# EAGLE board chirp-v2.4 (EAGLE 6.4)
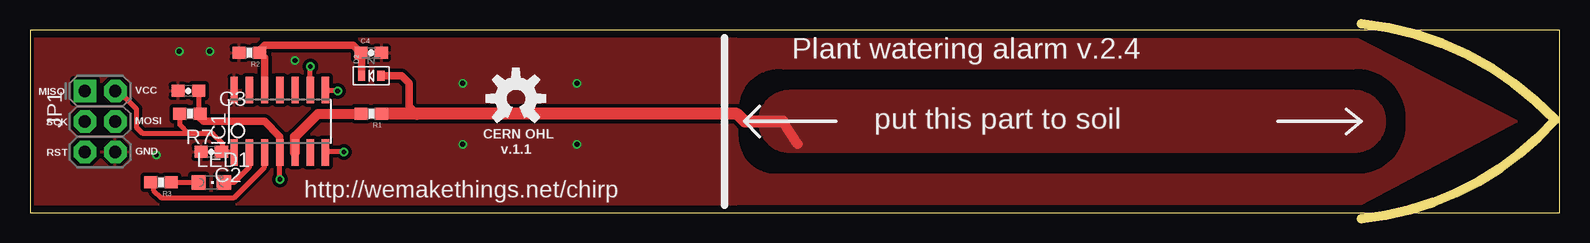
[diagram p0: board, top side]
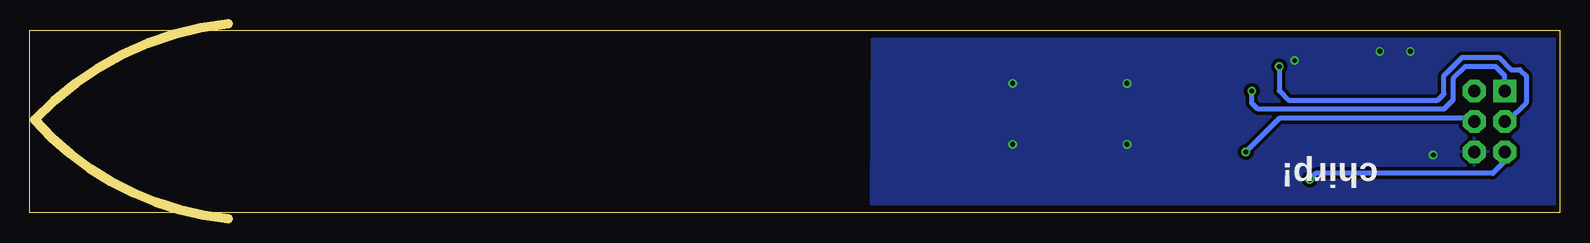
[diagram p1: board, bottom side, seen from below]

Size 127.51 x 15.24 mm. Coordinates in mm from the lower left corner, seen from the top.
Outline: 0,0 127.51,0 127.51,15.24 0,15.24 0,0
Copper layers (1*16): Top 0.035mm / dielectric 1.5mm / Bottom 0.035mm
Design rules "Fusion_eagle_rule_v1.1": minimum track width 6mil, minimum drill 12mil, track to track 6mil, track to pad 6mil, pad to pad 6mil, via to via 6mil, smd to smd 0mil, copper to edge 10mil, drill to drill 10mil, minimum pad ring 10mil, minimum via ring 6mil, stop-mask expansion 2mil, vias tented up to drill 100mil, thermal gap 10mil
Milling: 2 lines

## Footprints (pad centres in the part's own frame; a part is rotated, then mirrored left to right if it is on the bottom)
0603-CAP = smd 1.1 x 1: 1 -0.85,0; 2 0.85,0
SOD-523 = smd 0.8 x 0.6: A 0,-0.8; K 0,0.8
SOIC14 = smd 0.61 x 2.21: 1 -3.81,-2.603; 2 -2.54,-2.603; 3 -1.27,-2.603; 4 0,-2.603; 5 1.27,-2.603; 6 2.54,-2.603; 7 3.81,-2.603; 8 3.81,2.603; 9 2.54,2.603; 10 1.27,2.603; 11 0,2.603; 12 -1.27,2.603; 13 -2.54,2.603; 14 -3.81,2.603
2X3-NS = drill 1.016 pad 1.88 square: 1 -2.54,-1.27 | drill 1.016 pad 1.88 octagon: 2 -2.54,1.27; 3 0,-1.27; 4 0,1.27; 5 2.54,-1.27; 6 2.54,1.27
CHIPLED_0805 = smd 1.2 x 1.2: A 0,-1.05; C 0,1.05
0603-RES = smd 1.1 x 1: 1 -0.85,0; 2 0.85,0

## Placement (x,y rotation side)
C2  100nF  [0603-CAP]  15.11,5.08 180 top
C3  100nF  [0603-CAP]  13.21,10.16 180 top
C4  1uF  [0603-CAP]  28.45,13.34 0 top
D2  DIODE-SCHOTTKY_  [SOD-523]  28.45,11.43 90 top
IC1  TINY24/44/84-SSU  [SOIC14]  20.83,7.62 0 top
JP1  AVR_SPI_PRG_6NS  [2X3-NS]  5.84,7.62 270 top
LED1  [CHIPLED_0805]  15.11,2.54 270 top
R1  10K  [0603-RES]  28.45,8.26 180 top
R2  510K  [0603-RES]  18.29,13.34 180 top
R3  100R  [0603-RES]  10.92,2.54 180 top
R7  10K  [0603-RES]  13.34,8.26 180 top

## Library data of the parts
C2-C4 JP1 R1-R3 R7 = SparkFun
D2 = microbuilder
IC1 = avr-5
LED1 = adafruit

## Nets
CAPACITANCE_V: C4.1 D2.K IC1.12 R2.1
CLK_OUT: IC1.5 R1.2
GND: C2.2 C3.2 C4.2 IC1.14 JP1.6 R2.2
LED_A: IC1.3 R3.2
LED_K: IC1.2 LED1.C
MISO: IC1.8 JP1.1
MOSI: IC1.7 JP1.4
N$2: LED1.A R3.1
RESET: C3.1 IC1.4 JP1.5 R7.1
SCK: IC1.9 JP1.3
V_CAP: D2.A R1.1
VCC: C2.1 IC1.1 JP1.2 R7.2

## Tracks (layer width: path | path; a pad name or v marks a point on that pad's centre or on a via)
CAPACITANCE_V
  Top 0.406: 19.56,12.91 R2.1 19.14,13.55
  Top 0.61: 19.56,12.91 IC1.12 | 19.14,13.55 19.56,13.97 26.94,13.97 C4.1 27.65,13.29 D2.K
CLK_OUT
  Top 0.813: IC1.5 22.1,6.35 24,8.26 R1.2
GND  (via drill 0.4, 0.4 pad 0.3)
  other vias: 12.45,13.46 14.99,13.46 10.54,4.83 22.1,12.7 45.59,10.79 45.59,5.71 36.07,10.79 36.07,5.71
  pour Top (isolate 0.305): 0,14.47 0,0.76 58.93,0.76 58.93,14.47
  pour Bottom (isolate 0.305): 0,14.47 57.33,14.47 57.4,0.76 0,0.76
  pour Top (isolate 0.305, no thermals): 58.93,14.47 110.67,14.47 123.95,7.62 111,0.76 58.93,0.76 58.93,6.35 arc90 62.1,3.17 110.36,3.17 arc90 114.81,6.99 114.81,8.26 arc90 110.36,12.06 62.74,12.06 arc90 58.93,8.89
LED_A
  Top 0.406: IC1.3 19.56,3.81 17.02,1.27 10.92,1.27 10.29,1.91 10.29,2.33 R3.2
LED_K
  Top 0.406: IC1.2 18.29,3.81 17.02,2.54 LED1.C
MISO  (via drill 0.4 pad 0.3)
  Top 0.406: v25.65,10.16 24.7,10.16 IC1.8
  Bottom 0.406: v25.65,10.16 25.65,9.14 25.15,8.64 9.65,8.64 8.89,9.4 8.89,11.18 7.87,12.19 5.33,12.19 4.57,11.43 JP1.1
MOSI  (via drill 0.4 pad 0.3)
  Top 0.406: v26.16,5.08 24.7,5.08 IC1.7
  Bottom 0.406: v26.16,5.08 23.37,7.87 7.37,7.87 JP1.4
N$2
  Top 0.406: R3.1 LED1.A
RESET  (via drill 0.4 pad 0.3)
  Top 0.406: v20.83,2.79 IC1.4 | C3.1 14.06,8.38 R7.1 14.08,8.15 14.08,8.02
  Top 0.61: IC1.4 20.83,6.35 19.56,7.62 14.48,7.62 14.08,8.02
  Bottom 0.406: v20.83,2.79 20.32,3.3 5.59,3.3 4.57,4.32 JP1.5
SCK  (via drill 0.4 pad 0.3)
  Top 0.406: IC1.9 v23.37,12.19
  Bottom 0.406: v23.37,12.19 23.37,10.16 22.61,9.4 10.16,9.4 9.65,9.91 9.65,11.43 8.13,12.95 5.08,12.95 4.06,11.94 3.3,11.94 2.79,11.43 2.79,9.14 4.32,7.62 JP1.3
V_CAP
  Top 0.61: 32.26,8.26 31.62,8.89 31.62,10.79 30.99,11.43 D2.A
  Top 0.813: 62.74,7.62 63.99,5.74
  Top 1.016: 62.74,7.62 59.56,7.62 58.93,8.26 32.26,8.26 R1.1
  pour Top (no thermals): 60.83,7.62 arc-90 63.37,10.16 110.36,10.16 arc-90 112.9,7.62 arc-90 110.36,5.08 63.37,5.08 arc-90
VCC
  Top 0.406: IC1.1 16.95,5.08 C2.1 16,5.12 16,5.84 15.24,6.6 13.21,6.6 | JP1.2 7.37,10.16 8.89,8.64 8.89,7.11 9.4,6.6 13.21,6.6 | R7.2 12.48,7.33 13.21,6.6

## Text on the board
_tsilk: Plant watering alarm v.2.4 | MISO | VCC | SCK | MOSI | CERN OHL | put this part to soil | v.1.1 | RST | GND | http://wemakethings.net/chirp
_bsilk: chirp!